# Altium PCB board.PcbDoc
Units mm, origin at the board's own origin, x right, y up, seen from the top; angles counter-clockwise.
Board outline 45 x 42 mm, 2 copper layers (Top Layer, Bottom Layer), stack 1.57 mm thick; 103 components, 64 nets, 280 pads, 215 vias.
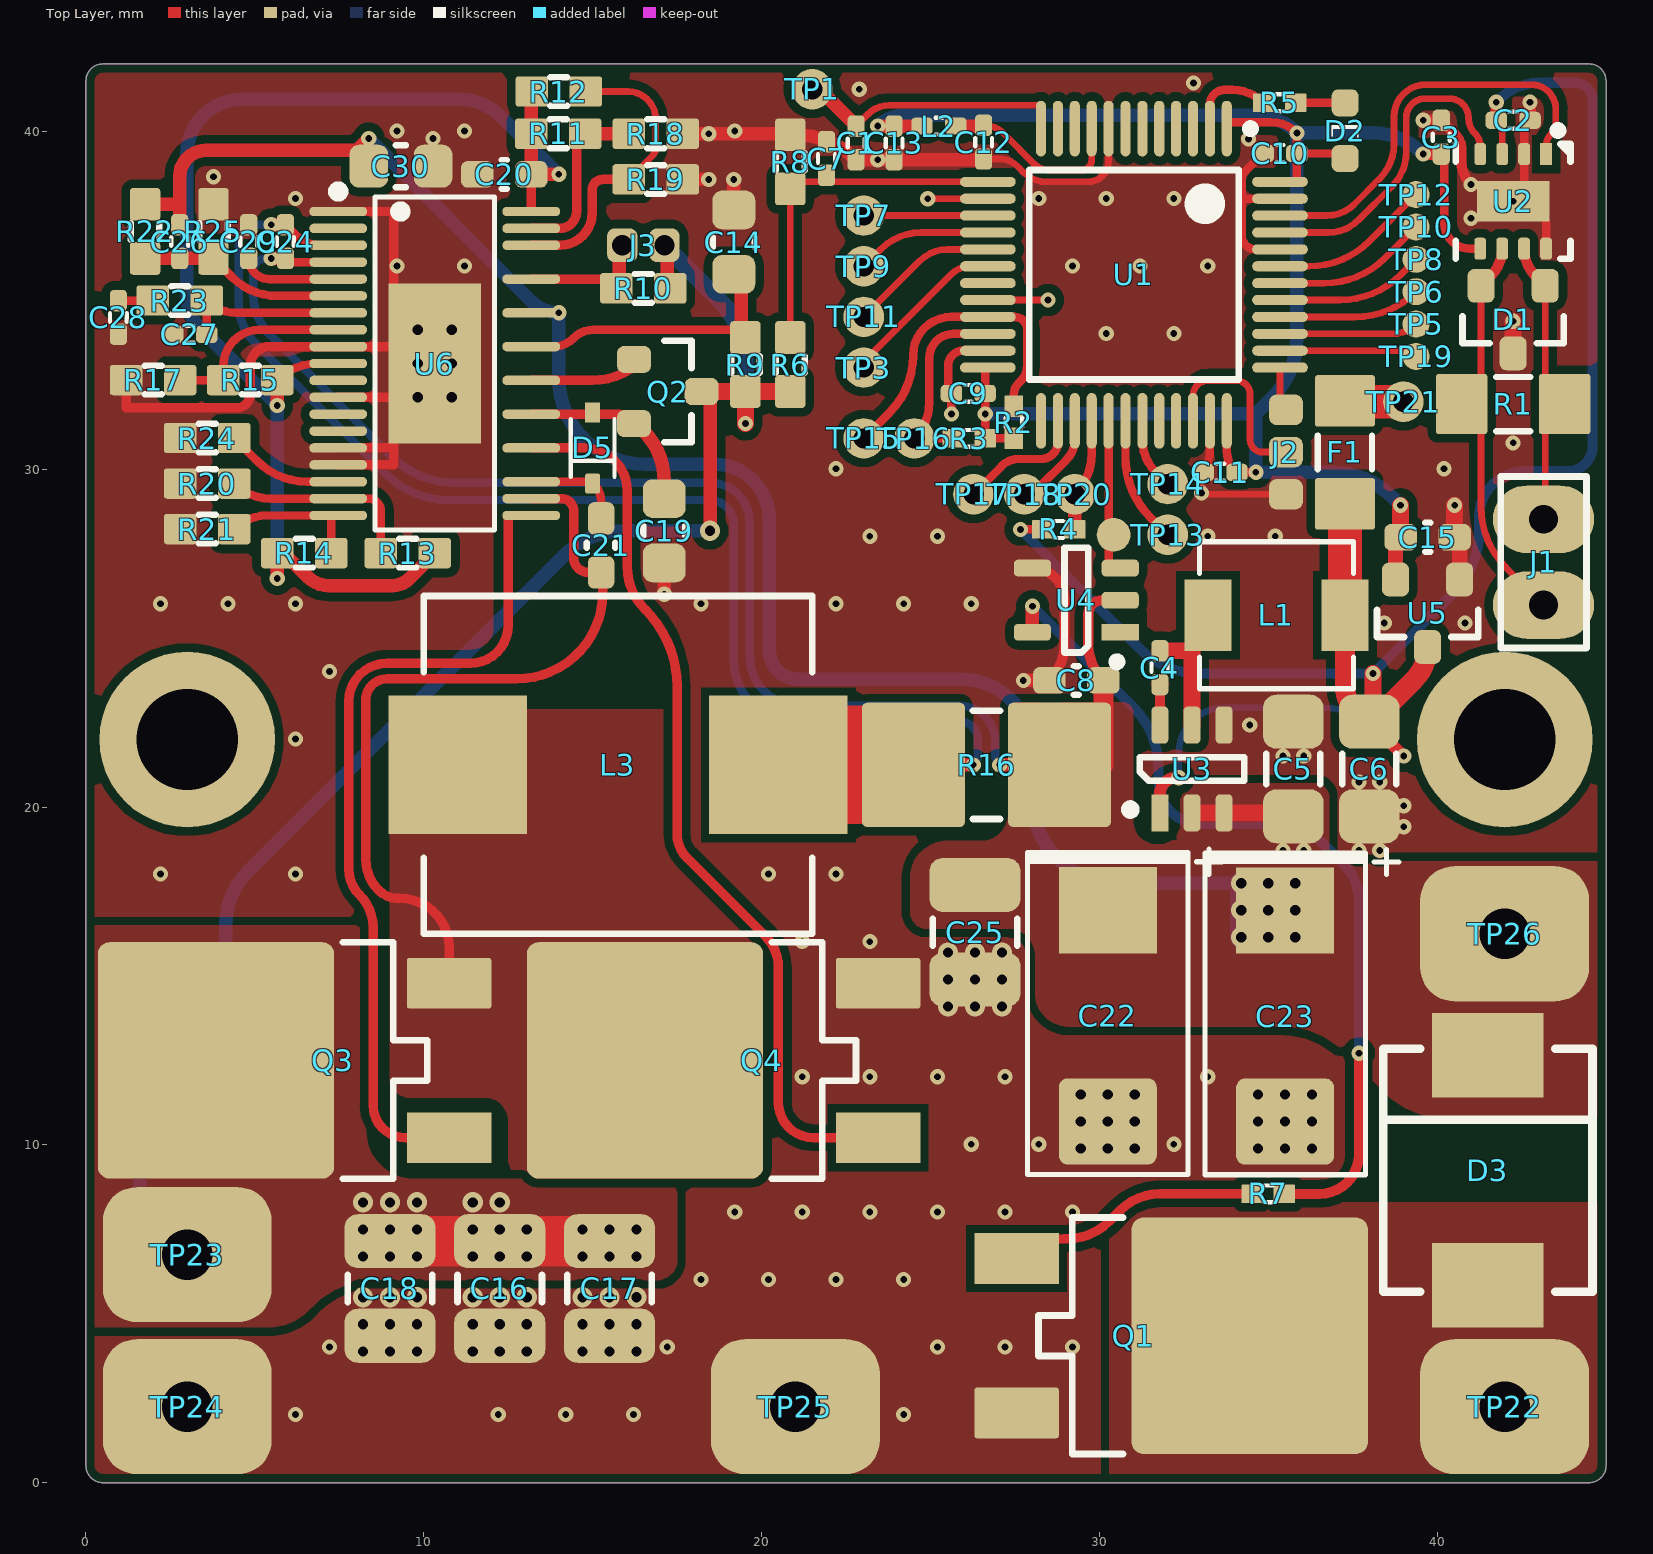
[diagram p0: Top Layer view]
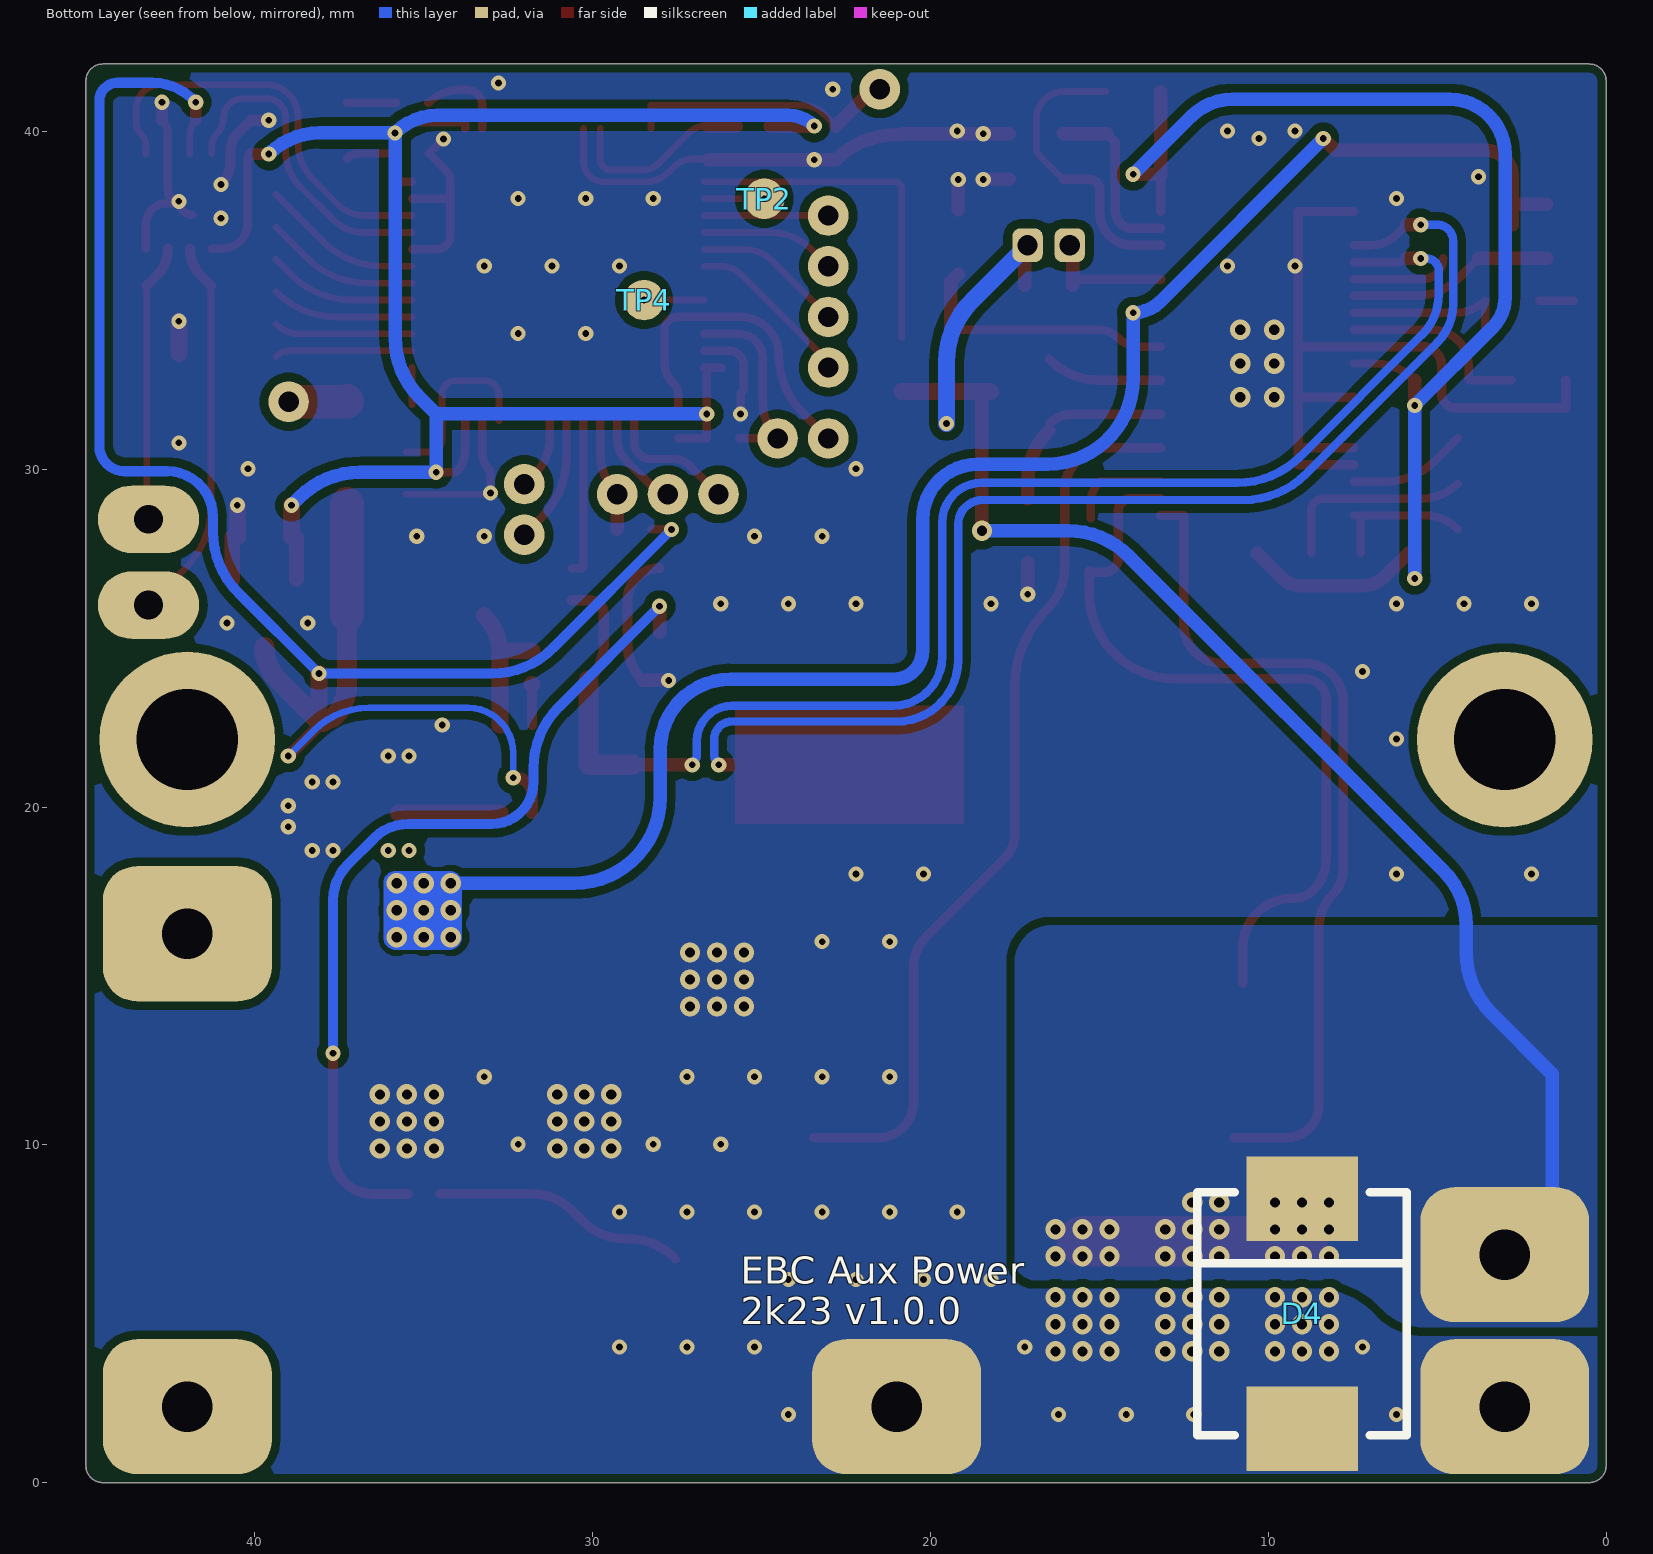
[diagram p1: Bottom Layer view, seen from below]
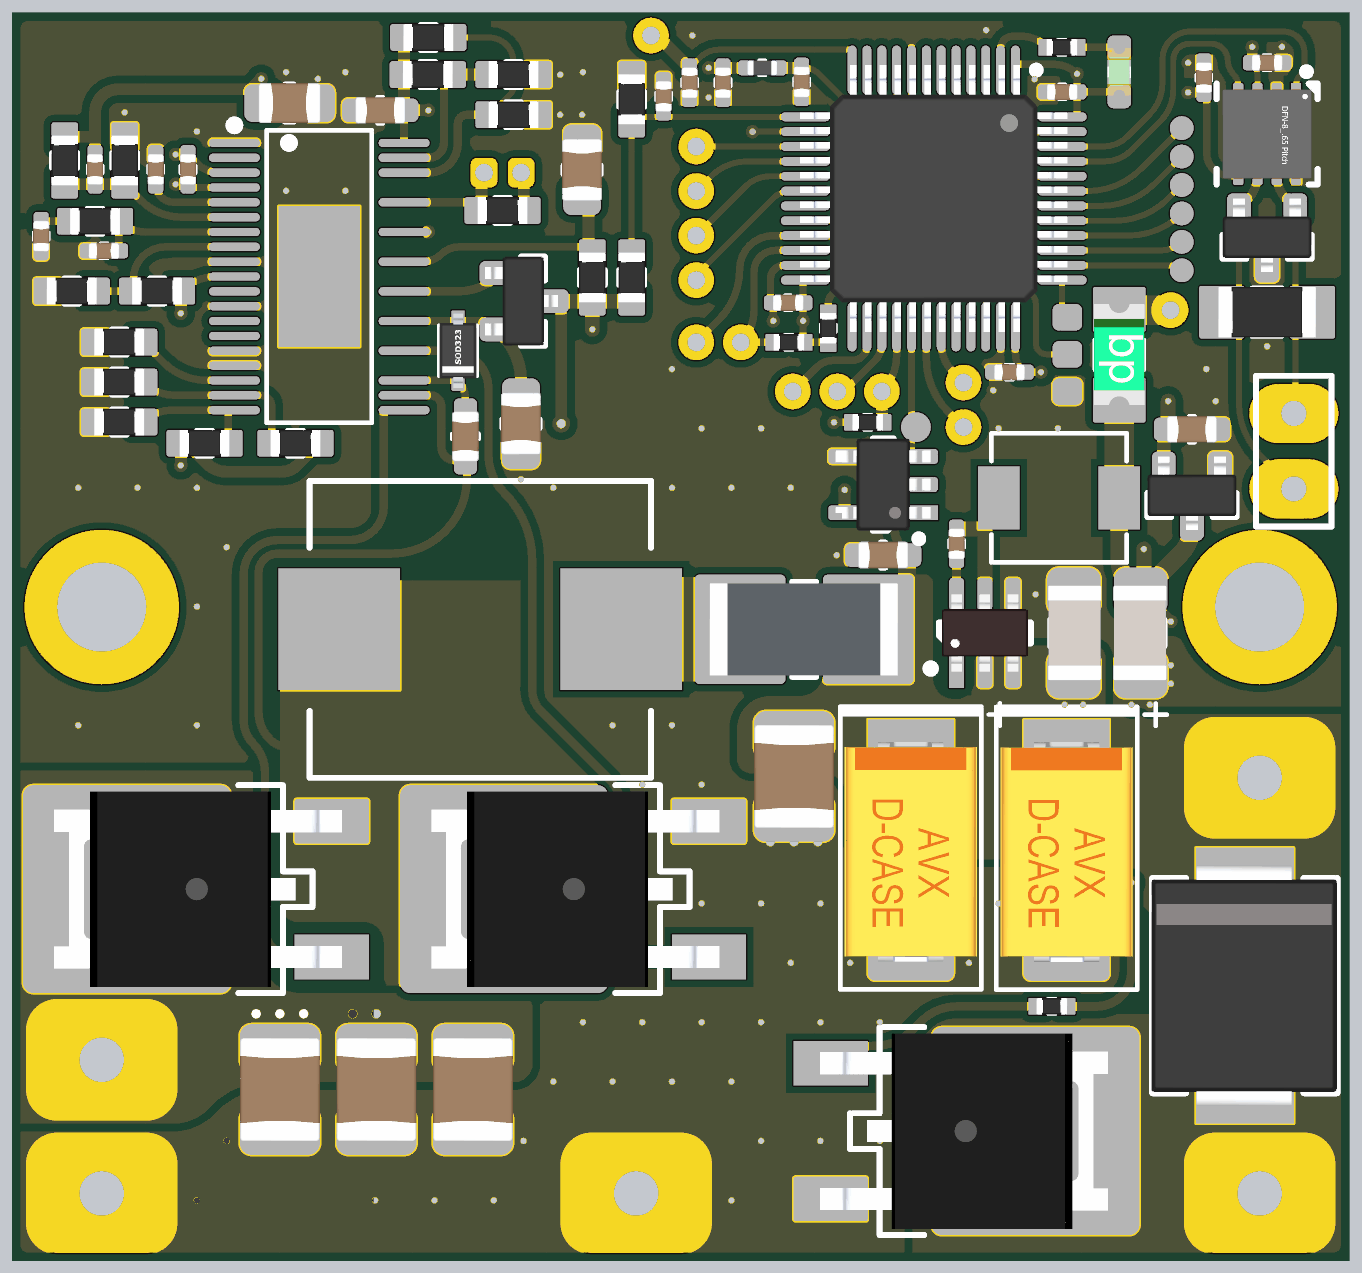
[diagram p2: 3D render of the assembled board from above, using the file's embedded part models]

## Layer stack, top to bottom
Top Solder: solder mask 0.0127, Solder Resist, Dk 3.8
Top Layer: signal copper 0.035
Dielectric: core 1.5, FR-4, Dk 4.5
Bottom Layer: signal copper 0.035
Bottom Solder: solder mask 0.0127, Solder Resist, Dk 3.8

## Board outline
0,0.5 ccw(c0.5,0.5) 0.5,0 44.5,0 44.5,-0.001 ccw(c44.5,0.499) 45,0.499 45,0.5 45,41.5 ccw(c44.5,41.5) 44.5,42 0.5,42 ccw(c0.5,41.5) 0,41.5

## Design rules (kind name [scope] priority, off if disabled: settings)
Clearance Clearance_2 [All] p1: gap=0.127 ignorepadtopadclearanceinfootprint=FALSE except(0: Arc-Hole Track-Hole SMDPad-Hole THPad-Hole Via-Hole Fill-Hole Poly-Hole Region-Hole Text-Hole; 0.254: Arc-Poly Track-Poly SMDPad-Poly THPad-Poly Via-Poly Fill-Poly Poly-Poly)
ComponentClearance [All] p1: gap=0.254 collisioncheckmode=3 verticalgap=0.254 showdistances=FALSE donotcheckwithout3dbody=TRUE
Height [All] p1 off: minheight=0 maxheight=25.4 prefheight=12.7
HoleSize [All] p1: absolutevalues=TRUE maxlimit=3 minlimit=0.025 maxpercent=80.000 minpercent=20.000
MinimumSolderMaskSliver [All] p1 off: minsoldermaskwidth=0.254
PolygonConnect [All] p1: connectstyle=Direct reliefconductorwidth=0.254 reliefentries=4 polygonreliefangle="90 Angle" airgapwidth=0.254
RoutingVias [All] p1: holewidth=0.711 width=1.524 viastyle="Through Hole" minholewidth=0.025 minwidth=0.025 maxholewidth=7.112 maxwidth=12.7
SilkToSilkClearance [All] p1 off: silktosilkclearance=0.254
SilkToSolderMaskClearance [IsPad] p1 off: minsilkscreentomaskgap=0.254 clearancetoexposedcopper=TRUE
SolderMaskExpansion [All] p1: expansion=0.05 istentingtop=FALSE
Width [All] p1: maxlimit=500 minlimit=0.15 preferedwidth=0.254
24 further rules are at their usual default settings.

## Components (designator, comment, footprint, x,y, rotation, side; value= is the part's Value field where it differs from the comment)
C1 "100nF" C0402 22.8,39.661 r90 top
C2 "100nF" C0402 42.25,40.332 r180 top
C3 "100nF" C0402 40.122,39.832 r270 top
C4 "100nF" C0402 31.793,24.128 r90 top
C5 "10uF" C1206 35.743,21.128 r270 top
C6 "10uF" C1206 37.993,21.128 r90 top
C7 "100nF" C0402 21.924,39.2 r270 top
C8 "2.2uF" C0603 29.32,23.75 r0 top
C9 "100nF" C0402 26.12,32.248 r0 top
C10 "100nF" C0402 35.349,39.35 r0 top
C11 "100nF" C0402 33.575,29.911 r0 top
C12 "100nF" C0402 26.574,39.686 r90 top
C13 "100nF" C0402 23.925,39.661 r90 top
C14 "10uF" C0805 19.179,36.725 r90 top
C15 "10uF" C0603 39.718,27.988 r180 top
C16 "2u2" C1210 12.25,5.75 r90 top
C17 "2u2" C1210 15.5,5.75 r90 top
C18 "2u2" C1210 9,5.75 r90 top
C19 "4u7" C0805 17.12,28.18 r270 top
C20 "100n" C0603 12.382,38.732 r0 top
C21 "100n" C0603 15.25,27.749 r90 top
C22 "150uF" C7343 30.25,13.757 r270 top
C23 "150uF" C7343 35.5,13.75 r270 top
C24 "1n" C0402 5.906,36.742 r90 top
C25 "22u" C1210 26.32,16.295 r90 top
C26 "" C0402 2.775,36.742 r270 top
C27 "100p" C0402 3.075,33.996 r180 top
C28 "4n7" C0402 0.96,34.496 r270 top
C29 "100n" C0402 4.818,36.742 r90 top
C30 "1u" C0805 9.325,38.974 r0 top
D1 "PESD2CAN" SOT-23 42.25,34.432 r90 top
D2 "GRN" LED-0603-GRN 37.274,40.025 r270 top
D3 "" SMC 41.5,9.25 r270 top
D4 "90V?" SMC 9,5 r270 bottom
D5 "1N4148WS" SOD-323 15,30.632 r90 top
F1 "0.25A" FUSE-1206 37.271,30.5 r270 top
J1 "" HDR-1X2_2.54 43.15,27.25 r0 top
J2 "SWD" HDR-1x3-P1.25 35.524,30.511 r270 top
J3 "" HDR-1x2-P1.25 16.5,36.632 r180 top
L1 "4.7uH" IND-SMD_L4.4-W4.2 35.243,25.678 r180 top
L2 "BEAD" L0402 25.25,40.161 r0 top
L3 "33uH" IND_10X11.5MM 15.75,21.25 r0 top
Q1 "AOD66923" "TO-252AA (DPAK)" 31,4.35 r90 top
Q2 "BSS123" SOT-23 17.226,32.303 r180 top
Q3 "AOD66923" "TO-252AA (DPAK)" 7.3,12.5 r270 top
Q4 "AOD66923" "TO-252AA (DPAK)" 20,12.5 r270 top
R1 "1k" R1206 42.25,31.932 r0 top
R2 "2k2" R0402 27.469,31.391 r270 top
R3 "2k2" R0402 26.144,30.915 r0 top
R4 "2k2" R0402 28.798,28.22 r180 top
R5 "470" R0402 35.339,40.85 r180 top
R6 "100k" R0603 20.85,33.103 r270 top
R7 "4R7" R0402 35,8.55 r180 top
R8 "3k" R0603 20.85,39.102 r270 top
R9 "2.2" R0603 19.523,33.103 r90 top
R10 "100k" R0603 16.5,35.357 r180 top
R11 "" R0603 13.983,39.934 r0 top
R12 "" R0603 14,41.184 r0 top
R13 "" R0603 9.525,27.518 r180 top
R14 "" R0603 6.463,27.518 r0 top
R15 "" R0603 4.863,32.642 r180 top
R16 "6mR" R2512-WIDE 26.66,21.25 r0 top
R17 "0" R0603 1.989,32.642 r180 top
R18 "0" R0603 16.869,39.934 r0 top
R19 "" R0603 16.869,38.582 r0 top
R20 "100k" R0603 3.589,29.578 r180 top
R21 "0" R0603 3.589,28.23 r180 top
R22 "180k" R0603 1.75,37.042 r270 top
R23 "10k" R0603 2.775,34.996 r180 top
R24 "30k" R0603 3.589,30.926 r180 top
R25 "13k" R0603 3.775,37.042 r90 top
TP1 "" TP_THT#1 21.5,41.231 r180 top
TP2 "" TP_THT#2 24.921,38.011 r180 bottom
TP3 "" TP_THT#3 23.024,33.011 r180 top
TP4 "" TP_THT#2 28.477,35.011 r180 bottom
TP5 "" TP_THT#4 39.376,34.299 r270 top
TP6 "" TP_THT#4 39.376,35.257 r270 top
TP7 "" TP_THT#3 23.024,37.511 r180 top
TP8 "" TP_THT#4 39.376,36.216 r270 top
TP9 "" TP_THT#3 23.024,36.011 r180 top
TP10 "" TP_THT#5 39.308,37.188 r180 top
TP11 "" TP_THT#3 23.024,34.511 r180 top
TP12 "" TP_THT#6 39.282,38.221 r180 top
TP13 "" TP_THT#3 32.024,28.061 r180 top
TP14 "" TP_THT#3 32.024,29.561 r270 top
TP15 "" TP_THT#3 23.024,30.915 r180 top
TP16 "" TP_THT#3 24.524,30.915 r180 top
TP17 "" TP_THT#3 26.274,29.261 r180 top
TP18 "" TP_THT#3 27.774,29.261 r180 top
TP19 "" TP_THT#4 39.376,33.341 r270 top
TP20 "" TP_THT#3 29.274,29.261 r180 top
TP21 "" TP_THT#7 39.009,31.998 r270 top
TP22 "" TP_THT#8 42.142,2.25 r270 top
TP23 "" TP_THT#9 3,6.75 r270 top
TP24 "" TP_THT#9 3,2.25 r270 top
TP25 "" TP_THT#10 20,2.25 r270 top
TP26 "" TP_THT#11 42,16 r270 top
U1 "STM32F103CBT6" LQFP-48 31.024,35.761 r270 top
U2 "SIT1042QTK/3" DFN8_3X3_P065 42.25,37.932 r270 top
U3 "AP63205" SOT-23-6 32.743,21.128 r0 top
U4 "MCP1416T" SOT-23-5 29.32,26.125 r0 top
U5 "XC6206P332MR" SOT-23 39.718,25.738 r90 top
U6 "LTC3895HFE#PBF" TSSOP-38_L9.7-W4.4-P0.50-LS6.4-BL-EP-PE 10.325,33.132 r270 top

## Footprints (in the part's own frame and the unit in brackets; to place one, negate y for a bottom-side part, rotate by r counter-clockwise, add the part's x,y. Pads: shape width x height; smd on the part's side, far side on the other; paste and mask are expansions set on the pad)
C0402 [mm] "Chip Capacitor Body"
  rrect50% 0.635x0.508 smd mask+0.05: 1(-0.5,0) 2(0.5,0)
  silkscreen extent -0.13,-0.25 0.13,0.25, body extent -0.52,-0.27 0.53,0.28, height 0.55
C0603 [mil] "Chip Capacitor"
  rrect50% 38x31 smd mask+1.97: 1(-31.5,0) 2(31.5,0)
  silkscreen extent -3,-17 3,17, body extent -33,-18 33,18, height 35
C0805 [mil] "Chip Capacitor"
  rrect50% 45x50 smd mask+1.97: 1(-37.5,0) 2(37.5,0)
  silkscreen extent -6,-25 6,25, body extent -41,-27 41,27, height 53
C1206 [mm] "Chip Capacitor"
  rrect50% 1.6x1.8 smd: 1(-1.4,0) 2(1.4,0)
  silkscreen extent -0.45,-0.8 0.45,0.8, body extent -1.6,-0.88 1.6,0.92, height 1.6
C1210 [mm] "Chip Capacitor"
  rrect50% 1.6x2.7 smd mask+0.05: 1(-1.4,0) 2(1.4,0)
  silkscreen extent -0.4,-1.25 0.4,1.25, body extent -1.75,-1.35 1.75,1.35, height 1.8
C7343 [mm] "C7343_1"
  rect 2.55x2.9 smd: 1(-3.188,0)
  rrect20% 2.55x2.9 smd: 2(3.061,0)
  silkscreen extent -5,-2.37 4.64,3.37, body extent -3.7,-2.22 3.7,2.22, height 3.01
DFN8_3X3_P065 [mm]
  rect 0.65x0.35 smd mask+0.05: 1(-1.4,0.975)
  rrect50% 0.65x0.35 smd mask+0.05: 2(-1.4,0.325) 3(-1.4,-0.325) 4(-1.4,-0.975) 5(1.4,-0.975) 6(1.4,-0.325) 7(1.4,0.325) 8(1.4,0.975)
  rect 1.2x2.15 smd mask+0.05: 9(0,0)
  silkscreen extent -2.22,-1.7 1.7,1.7, body extent -1.51,-1.5 1.51,1.5, height 0.8
FUSE-1206 [mil] "Chip FUSE;"
  rrect10% 60x70 smd mask+1.97: 1(-60,0) 2(60,0)
  silkscreen extent -20,-31 20,31, body extent -67,-33 67,33, height 31
HDR-1x2-P1.25 [mm]
  rrect50% 0.9x1 hole 0.6: 1(-0.625,0) 2(0.625,0)
HDR-1X2_2.54 [mm]
  oval 3x2 hole 0.85: 1(0,1.27) 2(0,-1.27)
  silkscreen extent -1.27,-2.54 1.27,2.54
HDR-1x3-P1.25 [mm]
  rrect50% 0.9x1 smd: 1(-1.25,0) 2(0,0) 3(1.25,0)
IND-SMD_L4.4-W4.2 [mm]
  rect 1.4x2.12 smd: 1(2.028,0) 2(-2.028,0)
  silkscreen extent -2.28,-2.18 2.28,2.18, body extent -2.28,-2.18 2.28,2.18, height 1.8
IND_10X11.5MM [mm]
  rect 4.1x4.1 smd: 1(-4.75,0) 2(4.75,0)
  silkscreen extent -5.75,-5 5.75,5, body extent -6,-5 6,5, height 4.8
L0402 [mm] "Chip Inductor"
  rrect50% 0.635x0.508 smd mask+0.05: 1(-0.5,0) 2(0.5,0)
  silkscreen extent -0.1,-0.25 0.1,0.25, body extent -0.5,-0.25 0.5,0.25, height 0.5
LED-0603-GRN [mm]
  rrect50% 0.8x0.8 smd mask+0.05: 1(0.825,0) 2(-0.825,0)
  silkscreen extent -0.18,-0.4 0.2,0.4, body extent -0.8,-0.4 0.8,0.4, height 0.6
LQFP-48 [mm]
  oval 1.65x0.3 smd: 1(-4.325,2.75) 2(-4.325,2.25) 3(-4.325,1.75) 4(-4.325,1.25) 5(-4.325,0.75) 6(-4.325,0.25) 7(-4.325,-0.25) 8(-4.325,-0.75) 9(-4.325,-1.25) 10(-4.325,-1.75) 11(-4.325,-2.25) 12(-4.325,-2.75) 25(4.325,-2.75) 26(4.325,-2.25) 27(4.325,-1.75) 28(4.325,-1.25) 29(4.325,-0.75) 30(4.325,-0.25) 31(4.325,0.25) 32(4.325,0.75) 33(4.325,1.25) 34(4.325,1.75) 35(4.325,2.25) 36(4.325,2.75)
  oval 0.3x1.65 smd: 13(-2.75,-4.325) 14(-2.25,-4.325) 15(-1.75,-4.325) 16(-1.25,-4.325) 17(-0.75,-4.325) 18(-0.25,-4.325) 19(0.25,-4.325) 20(0.75,-4.325) 21(1.25,-4.325) 22(1.75,-4.325) 23(2.25,-4.325) 24(2.75,-4.325) 37(2.75,4.325) 38(2.25,4.325) 39(1.75,4.325) 40(1.25,4.325) 41(0.75,4.325) 42(0.25,4.325) 43(-0.25,4.325) 44(-0.75,4.325) 45(-1.25,4.325) 46(-1.75,4.325) 47(-2.25,4.325) 48(-2.75,4.325)
  silkscreen extent -4.45,-3.1 3.1,3.58, body extent -4.5,-4.5 4.5,4.5, height 1.5
R0402 [mm]
  rrect10% 0.635x0.55 smd mask+0.05: 1(-0.476,0) 2(0.476,0)
  silkscreen extent -0.12,-0.25 0.13,0.25, body extent -0.52,-0.27 0.53,0.28, height 0.4
R0603 [mil] "Chip Resistor; Body 1.6 x 0.8 mm (LxW typ)"
  rrect20% 38x35.43 smd mask+1.97: 1(-31.5,0) 2(31.5,0)
  silkscreen extent -10,-17 10,17, body extent -33,-18 33,18, height 22
R1206 [mil] "Chip Resistor"
  rrect10% 60x70 smd mask+1.97: 1(-60,0) 2(60,0)
  silkscreen extent -20,-31 20,31, body extent -65,-33 65,33, height 26
R2512-WIDE [mm] "Chip Resistor; Body 6.4 x 3.2 mm (LxW typ)"
  rrect10% 3.05x3.68 smd mask+0.05: 1(-2.16,0) 2(2.16,0)
  silkscreen extent -0.4,-1.6 0.4,1.6, body extent -3.19,-1.55 3.16,1.55, height 0.55
SMC [mm]
  rect 2.5x3.3 smd: 1(3.4,0) 2(-3.4,0)
  silkscreen extent -3.6,-3.1 3.6,3.1, body extent -4.08,-3.15 4.08,3.1, height 2.65
SOD-323 [mm]
  rect 0.59x0.45 smd mask+0.05: 1(1.055,0)
  rrect30% 0.59x0.45 smd mask+0.05: 2(-1.055,0)
  silkscreen extent -0.85,-0.65 0.85,0.65, body extent -1.25,-0.63 1.25,0.62, height 0.99
SOT-23 [mm]
  rrect50% 1x0.8 smd mask+0.05: 1(1,-0.95) 2(1,0.95) 3(-1,0)
  silkscreen extent -0.7,-1.5 0.1,1.5, body extent -1.27,-1.5 1.33,1.5, height 1.1
SOT-23-5 [mm]
  rect 1.1x0.5 smd mask+0.05: 1(1.3,-0.95)
  rrect50% 1.1x0.5 smd mask+0.05: 2(1.3,0) 3(1.3,0.95) 4(-1.3,0.95) 5(-1.3,-0.95)
  silkscreen extent -0.35,-1.95 1.33,1.55, body extent -1.6,-1.55 1.6,1.55, height 1.45
SOT-23-6 [mm]
  rect 0.5x1.1 smd mask+0.05: 1(-0.95,-1.3)
  rrect50% 0.5x1.1 smd mask+0.05: 2(0,-1.3) 3(0.95,-1.3) 4(0.95,1.3) 5(0,1.3) 6(-0.95,1.3)
  silkscreen extent -1.95,-1.32 1.55,0.35, body extent -1.45,-1.3 1.45,1.3, height 1.14
"TO-252AA (DPAK)" [mm] "D-PAK"
  rect 1.5x2.5 smd: 1(2.286,3.45)
  rrect10% 7x7 smd: 2(0,-3.45)
  rrect10% 1.5x2.5 smd: 3(-2.286,3.45)
  silkscreen extent -3.5,0.3 3.5,2.8, body extent -3.29,-5.9 3.29,3.8, height 2.3
TP_THT#1 [mm]
  round 1.2 hole 0.6: 1(0,-0.019)
TP_THT#2 [mm]
  round 1.2 smd: 1(0,0)
TP_THT#3 [mm]
  round 1.2 hole 0.6: 1(0,0)
TP_THT#4 [mm]
  round 0.8 smd: 1(0,0)
TP_THT#5 [mm]
  round 0.8 smd: 1(-0.068,0.014)
TP_THT#6 [mm]
  round 0.8 smd: 1(-0.094,0.089)
TP_THT#7 [mm]
  round 1.2 hole 0.6: 1(-0.002,-0.009)
TP_THT#8 [mm]
  rrect50% 4x5 hole 1.5: 1(0,-0.142)
TP_THT#9 [mm]
  rrect50% 4x5 hole 1.5: 1(0,0)
TP_THT#10 [mm]
  rrect50% 4x5 hole 1.5: 1(0,1)
TP_THT#11 [mm]
  rrect50% 4x5 hole 1.5: 1(-0.25,0)
TSSOP-38_L9.7-W4.4-P0.50-LS6.4-BL-EP-PE [mm]
  oval 0.28x1.715 smd paste+0 mask+0.051: 1(-4.5,-2.858) 2(-4,-2.858) 3(-3.5,-2.858) 4(-3,-2.858) 5(-2.5,-2.858) 6(-2,-2.858) 7(-1.5,-2.858) 8(-1,-2.858) 9(-0.5,-2.857) 10(0,-2.857) 11(0.5,-2.857) 12(1,-2.857) 13(1.5,-2.857) 14(2,-2.857) 15(2.5,-2.857) 16(3,-2.857) 17(3.5,-2.857) 18(4,-2.857) 19(4.5,-2.857) 20(4.5,2.858) 21(4,2.858) 22(3.5,2.858) 24(2.5,2.858) 26(1.5,2.858) 28(0.5,2.857) 30(-0.5,2.857) 32(-1.5,2.857) 34(-2.5,2.857) 36(-3.5,2.857) 37(-4,2.857) 38(-4.5,2.857)
  rect 4.75x2.74 smd paste+0 mask+0.051: 39(0,0)
  silkscreen extent -5.24,-3.01 4.93,1.77, body extent -4.85,-2.2 4.85,2.2, height 0.8

## Part data
C1 C4 C7 C9 C10 C11 C12 C13 C15 C16 C17 C18: library part CAP
C2 C3: library part CAP, LCSC part number=C131394, P/N=CC0402KRX7R9BB104
C5 C6 C14 C19 C20 C21 C24 C26 C27 C28 C29 C30: library part CAP, LCSC part number=C89632, P/N=CL31B106KBHNNNE
C8: library part CAP, LCSC part number=C415535, P/N=GRM188Z71E225KE43D
C22 C23: library part 220uF
C25: library part CAP, LCSC part number=C778721, P/N=GMK325BJ226MM-P
D1: library part CDSOT23-SM712, LCSC part number=C5261081, P/N=PESD2CAN
D2: library part LED-0603-GREEN, "LED 0603 GRN"
D3 D4 D5: library part NCP51460SN33T1G, LCSC part number=C693617, P/N=SMCJ24A
F1: library part "Fuse 1", LCSC part number=C2924950, P/N=TLC-LSMD075/60
J1 J3: library part "Header 2"
J2: library part "Header 3"
L1: LCSC part number=C167208, P/N=FXL0420-4R7-M
L2: library part BLM18AG601SN1D, "BEAD 0402"
L3: library part SRN3015-100M, "FXL1050-330-M"
Q1 Q3 Q4: library part 2N7002
Q2: library part IRLML2402, "HEXFET Power MOSFET"
R1 R2 R3 R4 R5 R6 R8 R9 R10 R11 R12 R13 R14 R15 R16 R17 R18 R19 R20 R21 R22 R23 R24 R25: library part RES
R7: library part RES, LCSC part number=C137862, P/N=RC0402JR-074R7L
TP1 TP2 TP3 TP4 TP5 TP6 TP7 TP8 TP9 TP10 TP11 TP12 TP13 TP14 TP15 TP16 TP17 TP18 TP19 TP20 TP21 TP22 TP23 TP24 TP25 TP26: library part TP_Dup1
U2: library part LTC2875, "IC INTERFACE CAN", LCSC part number=C5308062, P/N=SIT1042QTK/3
U3: library part AP63203WU-7, LCSC part number=C780769, P/N=AP63203WU-7
U4: library part FL3100T, "IC GATE DRVR LOW-SIDE SOT23", LCSC part number=C83775, P/N=MCP1416T-E/OT
U5: library part Component_4_1
U6: LCSC part number=C580817, P/N=LTC3895HFE#PBF

## Free pads (board coordinates)
  round 1 smd: 2(30.422,28.061)
  round 5.2 hole 3: M(3,22) M(42,22)

## Via types
v1: diameter 0.45, hole 0.2, Top Layer to Bottom Layer, tented both sides, 122 vias
v2: diameter 0.6, hole 0.3, Top Layer to Bottom Layer, tented both sides, 87 vias
v3: diameter 0.61, hole 0.305, Top Layer to Bottom Layer, tented bottom, 6 vias

## Nets (pads, with @x,y where several pads share a name; then routed paths per layer and width w, separated by ;. In a path a pad name is that pad's centre, name@x,y a point inside that pad or via, vN(x,y) a via of type N, cw(c..) or ccw(c..) an arc to the next point about the centre after c; other vN are vias at no path point)
1_MISO: TP9.1 U1.16 | length 4
  Top Layer w0.2: TP9.1 23.523,36.51 cw(c24.733,35.3) 24.733,37.011 U1.16
1_MOSI: TP11.1 U1.17 | length 4.5
  Top Layer w0.2: TP11.1 24.681,36.168 cw(c25.509,35.34) 25.509,36.511 U1.17
1_SCK: TP7.1 U1.15 | length 3.7
  Top Layer w0.2: TP7.1 U1.15
2_MISO: TP18.1 U1.27 | length 2.9
  Top Layer w0.25: TP18.1 ccw(c27.774,29.823) 28.172,29.426 29.024,30.278 ccw(c28.422,30.881) 29.274,30.881 U1.27
2_MOSI: R4.1 TP20.1 U1.28 | length 3.3
  Top Layer w0.25: TP20.1 ccw(c28.068,30.467) 29.28,29.267 ccw(c28.068,30.467) 29.774,30.467 U1.28
  Top Layer w0.4: R4.1 TP20.1
2_SCK: TP17.1 U1.26 | length 3.8
  Top Layer w0.25: TP17.1 27.116,30.103 cw(c27.606,29.612) 27.606,30.306 28.273,30.306 ccw(c28.273,30.806) 28.774,30.806 U1.26
3V3: C3.2 C9.2 C10.2 C11.2 C13.2 C15.2 D2.1 L2.1 R2.2 R3.2 U1.1 U1.24 U1.36 U1.48 U2.5 U5.2 | length 58.7
  Top Layer w0.25: U1.24@26.183,33.011 U1.24@26.62,33.011 ; U1.24 U1.24@26.62,33.011 ; R2.2 R3.2 v1(26.62,31.638) C9.2 U1.24@26.62,33.011 ; U1.36 33.774,30.54 ccw(c34.627,30.54) C11.2@34.024,29.936 ; U1.1 33.774,40.279 35.078,40.279 cw(c35.078,39.189) v1(35.849,39.96) C10.2 ; C11.2@34.049,29.911 C11.2 v1(34.634,29.911) ; U1.48 35.849,38.511 C10.2 ; D2.1 ccw(c36.913,38.839) 36.913,39.35 C10.2 ; C3.2 40.213,39.241 40.213,37.285 ccw(c40.966,37.285) 40.966,36.532 U2.5
  Top Layer w0.35: v1(39.587,39.332) C3.2
  Top Layer w0.4: v1(23.441,40.161) C13.2 L2.1
  Top Layer w0.45: U5.2 38.768,27.988 C15.2
  Top Layer w0.5: C15.2 v1(38.918,28.936)
  Bottom Layer w0.4: v1(23.441,40.161) cw(c24.206,39.396) 24.206,40.479 34.596,40.479 cw(c34.596,38.707) v1(35.849,39.96) ; v1(26.62,31.638) 34.634,31.638 ; v1(38.918,28.936) 38.687,29.167 ccw(c36.891,27.371) 36.891,29.911 v1(34.634,29.911) 34.634,31.638 ; v1(39.587,39.332) ccw(c38.073,37.818) 38.073,39.96 v1(35.849,39.96) ; 34.634,31.638 35.105,32.109 ccw(c33.309,33.905) 35.849,33.905 v1(35.849,39.96)
5V: C2.2 C6.2 F1.2 L1.2 R4.2 U2.3 U3.1 U5.3 | length 60.3
  Top Layer w0.2: C2.2 cw(c41.328,39.91) 41.925,39.91 U2.3
  Top Layer w0.25: v1(27.663,28.22) R4.2@28.273,28.22
  Top Layer w0.35: U3.1 31.793,20.385 cw(c32.276,20.385) 32.276,20.867 v1(32.352,20.867) ; C6.2 v1(39.009,21.512) ; C2.2 v1(41.75,40.867)
  Top Layer w0.5: C6.2@38.1,23.007 v1(38.1,23.955)
  Top Layer w0.6: L1.2 37.271,23.628 ccw(c38.638,23.628) 37.672,22.662 C6.2 38.078,22.528 39.316,23.766 ccw(c38.345,24.738) U5.3
  Top Layer w1: L1.2 F1.2
  Bottom Layer w0.2: v1(32.352,20.867) 32.352,21.602 cw(c33.69,21.602) 33.69,22.94 36.615,22.94 cw(c36.615,20.605) 38.266,22.256 v1(39.009,21.512)
  Bottom Layer w0.3: v1(27.663,28.22) 31.184,24.699 ccw(c32.981,26.495) 32.981,23.955 v1(38.1,23.955) 40.493,26.348 ccw(c38.697,28.144) 41.237,28.144 41.237,28.585 cw(c42.596,28.585) 42.596,29.944 43.859,29.944 ccw(c43.859,30.69) 44.605,30.69 44.605,40.905 ccw(c44.066,40.905) 44.066,41.444 43.028,41.444 ccw(c43.028,39.754) v1@41.754,40.864
12V: C5.2 C8.2 C22.1 C23.1 C24.1 C25.2 C26.1 C30.1 D3.2 R16.2 R22.1 TP26.1 U3.2 U3.3 U4.2 U6.4 U6.32 | length 95.9
  Top Layer w0.25: C24.1 ccw(c6.171,36.508) 6.171,36.132 U6.4
  Top Layer w0.3: C8.2 cw(c31.207,24.837) 29.67,24.837 29.67,25.712 cw(c30.083,25.712) 30.083,26.125 U4.2
  Top Layer w0.4: R22.1 2.775,37.843 ; C26.1 2.775,37.843 ; v1(5.488,36.242) C24.1 ; v1(8.372,39.791) 8.023,39.442 3.551,39.442 ccw(c3.551,38.666) 2.775,38.666 2.775,37.843 ; v1(27.053,21.25) R16.2
  Top Layer w0.5: U3.2 U3.3 C5.2@35.743,19.828
  Top Layer w0.6: R16.2 30.12,21.25 C8.2
  Bottom Layer w0.25: 5.445,33.987 9.063,30.369 ccw(c10.916,32.222) 10.916,29.601 18.476,29.601 cw(c18.476,28.424) 19.654,28.424 19.654,24.451 ccw(c21.105,24.451) 21.105,23 25.871,23 cw(c25.871,21.957) 26.914,21.957 26.914,21.584 ccw(c27.387,21.584) v1(27.053,21.25) ; 5.444,33.988 cw(c6.64,35.182) 4.95,35.182 4.95,35.882 cw(c5.31,35.882) 5.31,36.242 v1(5.488,36.242)
  Bottom Layer w0.4: v1(8.372,39.791) 13.2,34.964 ccw(c14,35.764) v1(14,34.632) 14,32.693 ccw(c16.54,32.693) 16.54,30.153 18.593,30.153 cw(c18.593,28.514) 20.232,28.514 20.232,24.639 ccw(c21.083,24.639) 21.083,23.787 25.916,23.787 cw(c25.916,21.703) 28,21.703 28,20.285 ccw(c30.54,20.285) 30.54,17.745 v2(34.2,17.745)
  other v1: 35.434,18.712 36.053,18.712
  other v2: 34.2,16.145 35,16.145 35.8,16.145 34.2,16.945 35,16.945 35.8,16.945 35,17.745 35.8,17.745
_NC2: TP4.1 U1.20 | length 1.8
  Top Layer w0.2: U1.20 v1(28.477,35.011)
ADC_1: C1.2 TP1.1 U1.12 | length 8.1
  Top Layer w0.2: C1.2 23.152,40.513 cw(c23.781,39.884) 23.781,40.774 28.274,40.774 U1.12
  Top Layer w0.4: TP1.1 cw(c21.5,40.739) 21.861,41.1 C1.2
ADC_4: TP2.1 U1.14 | length 1.8
  Top Layer w0.2: v1(24.921,38.011) U1.14
B_SENS: C7.2 R6.1 R8.2 U1.13 | length 10.4
  Top Layer w0.2: R6.1 R8.2 cw(c21.059,38.302) 21.059,38.511 21.12,38.511 U1.13
CAN_H: D1.1 J1.1 R1.2 U2.7 | length 8.2
  Top Layer w0.2: J1.1@43.201,28.52 D1.1
  Top Layer w0.3: U2.7 ccw(c43.722,36.532) 42.911,35.722 D1.1
CAN_L: D1.2 J1.2 R1.1 U2.6 | length 11.4
  Top Layer w0.2: D1.2 41.3,28.882 ccw(c43.84,28.882) 42.044,27.086 J1.2
  Top Layer w0.3: D1.2 41.59,35.722 ccw(c40.779,36.532) U2.6
CAN_RX: U1.45 U2.4 | length 9.6
  Top Layer w0.2: U1.45 36.785,37.011 ccw(c36.785,38.261) 37.669,37.377 38.657,38.365 ccw(c37.614,39.407) 39.089,39.407 39.089,40.425 cw(c39.637,40.425) 39.637,40.974 40.367,40.974 cw(c40.367,40.415) 40.925,40.415 ccw(c41.608,40.415) 41.125,39.932 cw(c40.763,39.57) 41.275,39.57 U2.4
CAN_TX: U1.46 U2.1 | length 12.5
  Top Layer w0.2: U1.46 36.733,37.511 ccw(c36.733,38.661) 37.547,37.848 38.287,38.589 ccw(c37.228,39.648) 38.726,39.648 38.726,40.448 cw(c39.666,40.448) 39.666,41.388 42.791,41.388 cw(c42.791,40.666) 43.513,40.666 43.513,40.264 cw(c43.044,40.264) 43.375,39.932 ccw(c43.738,39.57) 43.225,39.57 U2.1
DM: U1.32
DP: U1.33
GND: C1.1 C2.1 C3.1 C5.1 C6.1 C7.1 C8.1 C9.1 C10.1 C11.1 C12.1 C13.1 C14.2 C15.1 C16.1 C17.1 C18.1 C19.2 C20.1 C22.2 C23.2 C25.1 C27.2 C28.2 C29.2 C30.2 D1.3 D4.1 J2.3 Q1.3 Q4.3 R8.1 R17.2 R18.2 R19.2 R20.2 R21.2 R24.2 R25.2 TP24.1 TP25.1 U1.8 U1.23 U1.35 U1.44 U1.47 U2.2 U2.8 U2.9 U3.4 U4.4 U5.1 U6.1 U6.9 U6.12 U6.15 U6.16 U6.39 | length 71.1
  Top Layer w0.2: C12.1 27.051,39.186 cw(c27.051,38.429) 27.586,38.964 27.773,38.776 ccw(c28.415,39.418) 28.415,38.511 29.67,38.511 ccw(c29.67,39.115) 30.274,39.115 U1.8 ; v1(33.024,29.301) ccw(c33.122,29.399) 33.122,29.261 J2.3
  Top Layer w0.25: v1(25.62,31.638) C9.1 25.524,32.344 25.524,33.064 cw(c25.97,33.064) 25.97,33.511 U1.23 ; v1(33.024,29.301) 33.024,29.936 ccw(c32.42,30.54) 33.274,30.54 U1.35 ; v1(34.418,39.781) C10.1 34.343,38.844 ccw(c34.65,38.537) 34.216,38.537 34.216,38.011 ; U1.44 34.634,36.511 cw(c34.634,36.929) 34.216,36.929 34.216,38.011 ; U1.47 34.216,38.011 ; U2.9@41.85,37.532 ccw(c41.85,37.932) v1(42.25,37.932) ; C2.1 ccw(c43.173,39.91) 42.575,39.91 U2.2 42.575,38.257 cw(c42.25,38.257) v1(42.25,37.932) ; U2.8 43.225,37.264 ccw(c42.618,37.264) 42.618,37.871 42.311,37.871 cw(c42.311,37.932) v1(42.25,37.932)
  Top Layer w0.28: R17.2 1.189,31.819 4.454,31.819 ccw(c4.454,32.231) 4.866,32.231 4.866,33.064 cw(c5.434,33.064) 5.434,33.632 U6.9 U6.39@9.115,33.632 ; U6.16 9.115,30.132 9.115,30.632 ; U6.15 9.115,30.632 ; U6.12 U6.39@9.115,32.132 ; U6.1 9.115,37.632 U6.39@9.115,33.632 ; 9.115,30.632 U6.39@9.115,32.132 ; U6.39@9.115,32.132 U6.39@9.115,33.632
  Top Layer w0.3: U4.4 cw(c28.02,26.125) 28.97,26.125 28.97,24.837 cw(c27.433,24.837) C8.1@28.521,23.751 ; C3.1 40.122,40.325 40.529,39.919 cw(c40.071,39.461) 40.677,39.688 cw(c40.071,39.461) 40.718,39.461 40.718,39.124 ccw(c41.697,39.124) v1(41.005,38.432)
  Top Layer w0.35: v1(39.587,40.332) C3.1 ; C2.1 v1(42.75,40.867)
  Top Layer w0.4: v1(17.12,26.303) C19.2 ; R19.2 v1(18.438,38.582) ; R18.2 v1(18.438,39.934) 20.771,39.934 cw(c20.771,39.823) R8.1 21.013,39.902 cw(c21.013,37.374) C1.1 v1(23.441,39.161) C13.1 C12.1@26.574,39.161 ; C14.2 v1(19.179,38.582) ; v1(27.751,23.75) C8.1
  Top Layer w0.45: U5.1 C15.1@40.668,27.988
  Top Layer w0.5: C15.1 v1(40.519,28.936) ; D1.3 v1(42.25,34.38)
  other v1: 6.207,2.017 12.207,2.017 14.207,2.017 16.207,2.017 24.207,2.017 7.207,4.017 17.207,4.017 25.207,4.017 27.207,4.017 29.207,4.017 18.207,6.017 20.207,6.017 22.207,6.017 24.207,6.017 19.207,8.017 21.207,8.017 23.207,8.017 25.207,8.017 27.207,8.017 29.207,8.017 26.207,10.017 28.207,10.017 32.207,10.017 21.207,12.017 23.207,12.017 25.207,12.017 27.207,12.017 33.207,12.017 21.207,16.017 23.207,16.017 2.207,18.017 6.207,18.017 20.207,18.017 22.207,18.017 37.683,18.712 38.303,18.712 39.009,19.419 39.009,20.038 37.683,20.744 38.303,20.744 35.434,21.512 36.053,21.512 6.207,22.017 34.455,22.428 7.207,24.017 38.434,25.448 40.824,25.448 2.207,26.017 4.207,26.017 6.207,26.017 18.207,26.017 22.207,26.017 24.207,26.017 26.207,26.017 23.207,28.017 25.207,28.017 33.207,28.017 35.207,28.017 22.207,30.017 40.207,30.017 42.25,30.783 30.207,34.017 32.207,34.017 9.207,36.017 11.207,36.017 29.207,36.017 31.207,36.017 33.207,36.017 41.005,37.433 6.207,38.017 28.207,38.017 30.207,38.017 32.207,38.017 3.775,38.66 10.277,39.791 9.207,40.017 11.207,40.017 19.207,40.017 22.894,41.25 32.785,41.434
  other v2: 8.2,3.889 9,3.889 9.8,3.889 11.45,3.889 12.25,3.889 13.05,3.889 14.7,3.889 15.5,3.889 16.3,3.889 8.2,4.689 9,4.689 9.8,4.689 11.45,4.689 12.25,4.689 13.05,4.689 14.7,4.689 15.5,4.689 16.3,4.689 8.2,5.489 9,5.489 9.8,5.489 11.45,5.489 12.25,5.489 13.05,5.489 14.7,5.489 15.5,5.489 16.3,5.489 29.45,9.896 30.25,9.896 31.05,9.896 34.7,9.896 35.5,9.896 36.3,9.896 29.45,10.696 30.25,10.696 31.05,10.696 34.7,10.696 35.5,10.696 36.3,10.696 29.45,11.496 30.25,11.496 31.05,11.496 34.7,11.496 35.5,11.496 36.3,11.496 25.52,14.095 26.32,14.095 27.12,14.095 25.52,14.895 26.32,14.895 27.12,14.895 25.52,15.695 26.32,15.695 27.12,15.695
  other v3: 9.825,32.132 10.825,32.132 9.825,33.132 10.825,33.132 9.825,34.132 10.825,34.132
LOAD: pad.2 U1.29 U4.3 | length 4.7
  Top Layer w0.25: U1.29 30.274,27.119 30.318,27.075 U4.3
NetC4_1: C4.1 U3.6 | length 1.2
  Top Layer w0.3: U3.6 C4.1
NetC4_2: C4.2 L1.1 U3.5 | length 4.4
  Top Layer w0.5: C4.2 32.743,24.628 32.743,24.539 ; U3.5 32.743,24.539 ; L1.1 ccw(c34.355,24.539) 32.743,24.539
NetC12_2: C12.2 L2.2 U1.9 | length 5.6
  Top Layer w0.2: C12.2 cw(c26.574,39.326) 26.783,40.16 cw(c26.574,39.326) 27.182,39.934 28.086,39.03 ccw(c28.494,39.438) 28.494,38.861 29.474,38.861 ccw(c29.474,39.161) 29.774,39.161 U1.9
  Top Layer w0.4: L2.2 C12.2@26.574,40.161
NetC14_1: C14.1 R9.2 U6.30 | length 8.4
  Top Layer w0.25: U6.30 13.829,33.632 ccw(c13.829,34.486) 14.432,33.882 cw(c15.036,33.279) 15.036,34.132 19.293,34.132 19.4,34.026 R9.2
  Top Layer w0.4: C14.1 19.4,35.552 R9.2@19.4,34.026
NetC19_1: C19.1 D5.1 Q2.2 U6.26 | length 5.5
  Top Layer w0.28: U6.26 15.801,31.632 cw(c15.801,30.677) Q2.2@16.476,31.353
  Top Layer w0.4: Q2.2@16.503,31.138 cw(c15.012,29.647) 17.12,29.647 C19.1
NetC21_1: C21.1 L3.1 Q3.3 Q4.2 U6.21 | length 23.2
  Top Layer w0.28: Q3.3 10.75,15.85 ccw(c9.302,15.85) 9.302,17.298 cw(c9.241,18.096) 8.697,17.508 cw(c9.58,18.462) 8.28,18.462 8.28,23.162 cw(c8.918,23.162) 8.918,23.8 12.76,23.8 ccw(c12.76,26.34) 13.752,24.002 ccw(c12.76,26.34) 15.3,26.34 C21.1@15.3,27 ; U6.21 14.075,29.132 cw(c14.075,28.767) 14.44,28.767 14.44,27.379 ccw(c14.87,27.379) 14.87,26.949 C21.1
NetC21_2: C21.2 D5.2 U6.22 | length 3
  Top Layer w0.25: U6.22 15,29.632 cw(c14.397,29.029) 15.25,29.029 C21.2
NetC24_2: C24.2 L3.2 R16.1 U6.3 | length 38.1
  Top Layer w0.25: C24.2 6.211,36.937 ccw(c6.947,37.674) 6.947,36.632 U6.3
  Top Layer w0.4: v1(5.488,37.242) C24.2 ; R16.1 v1(26.267,21.25)
  Bottom Layer w0.25: v1(5.488,37.242) 5.007,37.242 ccw(c5.007,36.761) 4.525,36.761 4.525,34.899 ccw(c6.169,34.899) 5.007,33.736 8.883,29.86 ccw(c10.736,31.713) 10.736,29.092 18.459,29.092 cw(c18.459,28.372) 19.179,28.372 19.179,24.355 ccw(c21,24.355) 21,22.534 25.871,22.534 cw(c25.871,22) 26.405,22 26.405,21.582 cw(c25.936,21.582) v1(26.267,21.25)
NetC26_2: C26.2 R22.2 R25.1 U6.6 | length 6.1
  Top Layer w0.25: R25.1 4.33,35.687 ccw(c5.67,37.027) 5.67,35.132 U6.6
  Top Layer w0.4: R22.2 R25.1
NetC27_1: C27.1 R23.1 U6.7 | length 5
  Top Layer w0.25: C27.1 R23.1 ccw(c4.454,35.875) 4.454,34.632 U6.7
NetC28_1: C28.1 R23.2 | length 1
  Top Layer w0.25: C28.1 R23.2
NetC29_1: C29.1 U6.5 | length 3
  Top Layer w0.25: C29.1 ccw(c5.428,36.242) 5.428,35.632 U6.5
NetD2_2: D2.2 R5.1 | length 1.5
  Top Layer w0.25: R5.1 D2.2
NetD3_1: D3.1 Q1.2 TP22.1
NetF1_1: F1.1 TP21.1 | length 1.8
  Top Layer w1: F1.1 37.271,32 TP21.1
NetJ3_2: J3.2 R10.2 U6.34 | length 3.9
  Top Layer w0.28: U6.34 R10.2@15.785,35.632
  Top Layer w0.4: R10.2@15.785,35.443 15.785,35.632 15.785,36.632 J3.2
NetQ1_1: Q1.1 R7.2 | length 7.5
  Top Layer w0.28: Q1.1 cw(c28.961,5.225) 28.961,7.221 29.046,7.221 ccw(c29.046,8.974) 30.286,7.734 30.613,8.062 cw(c31.792,6.883) 31.792,8.55 R7.2
NetQ2_1: Q2.1 U6.28 | length 3.5
  Top Layer w0.28: U6.28 14.983,32.632 ccw(c14.983,34.741) 16.474,33.25 Q2.1@16.476,33.253
NetQ3_1: Q3.1 U6.20 | length 25.1
  Top Layer w0.28: Q3.1@11,10.214 Q3.1 9.46,10.214 cw(c9.46,11.174) 8.5,11.174 8.5,16.434 ccw(c7.134,16.434) 8.1,17.4 cw(c8.872,18.172) 7.78,18.172 7.78,23.129 cw(c8.909,23.129) 8.909,24.257 11.377,24.257 ccw(c11.377,25.38) 12.5,25.38 12.5,28.632 U6.20
NetQ4_1: Q4.1 U6.24 | length 26.8
  Top Layer w0.28: U6.24 14.758,30.632 cw(c14.758,29.365) 16.025,29.365 16.025,27.12 ccw(c17.817,27.12) 16.55,25.852 16.566,25.836 cw(c14.317,23.586) 17.498,23.586 17.498,19.201 ccw(c18.481,19.201) 17.786,18.506 20.117,16.175 cw(c19.192,15.25) 20.5,15.25 20.5,11.25 ccw(c21.536,11.25) 21.536,10.214 Q4.1
NetR5_2: R5.2 U1.2 | length 2.7
  Top Layer w0.25: U1.2 33.274,40.811 cw(c33.695,40.811) 33.695,41.231 33.943,41.231 cw(c33.943,39.93) R5.2
NetR7_1: R7.1 U4.5 | length 25.6
  Top Layer w0.3: R7.1 36.515,8.55 ccw(c36.515,9.718) 37.683,9.718 v1(37.683,12.714)
  Top Layer w0.4: U4.5 v1(28.02,25.944)
  Bottom Layer w0.3: v1(28.02,25.944) 31.006,22.958 cw(c29.21,21.162) 31.75,21.162 31.75,20.744 ccw(c32.994,20.744) 32.994,19.5 35.457,19.5 cw(c35.457,18.068) 36.469,19.081 37.247,18.303 cw(c36.195,17.25) 37.683,17.25 v1(37.683,12.714)
NetR11_2: R11.2 R18.1 U6.37 | length 5.3
  Top Layer w0.28: U6.37 14.025,37.132 ccw(c14.025,37.632) 14.525,37.632 14.525,39.676 R11.2
  Top Layer w0.4: R11.2 R18.1
NetR12_2: R12.2 R19.1 U6.36 | length 8.9
  Top Layer w0.2: R12.2 16.044,41.184 cw(c16.044,40.359) 16.869,40.359 16.869,39.509 cw(c16.562,39.509) 16.779,39.293 R19.1
  Top Layer w0.28: U6.36 14.024,36.632 ccw(c14.024,37.599) 14.99,37.599 14.99,38.272 cw(c15.3,38.272) 15.3,38.582 R19.1
NetR13_2: R13.2 R20.1 U6.18 | length 5.9
  Top Layer w0.25: R20.1 ccw(c5.465,30.654) 5.465,29.132 U6.18 8.372,29.132 cw(c8.372,28.78) 8.725,28.78 R13.2
NetR14_2: R14.2 R21.1 U6.19 | length 4.3
  Top Layer w0.25: R21.1 cw(c5.36,27.26) 5.36,28.632 U6.19@7.264,28.632 ; R14.2 U6.19@7.264,28.632 ; U6.19 U6.19@7.264,28.632
NetR15_2: R15.2 R17.1 U6.8 | length 5.7
  Top Layer w0.25: R17.1 R15.2 4.063,33.045 cw(c5.151,33.045) 5.151,34.132 U6.8
NetR24_1: R24.1 U6.17 | length 3.5
  Top Layer w0.25: R24.1 5.065,30.25 ccw(c6.556,31.741) 6.556,29.632 U6.17
RX: TP12.1 U1.43 | length 4.8
  Top Layer w0.2: U1.43 36.203,36.011 ccw(c36.203,38.551) 37.999,36.755 TP12.1
SCL: R2.1 TP15.1 U1.21 | length 9.6
  Top Layer w0.25: TP15.1 23.781,31.673 ccw(c22.08,33.374) 24.486,33.374 cw(c25.623,33.374) 25.623,34.511 U1.21 27.489,34.511 cw(c27.489,34.136) 27.864,34.136 27.864,33.069 cw(c27.216,33.069) 27.674,32.61 27.597,32.533 ccw(c27.905,32.225) 27.469,32.225 R2.1
SDA: R3.1 TP16.1 U1.22 | length 5.3
  Top Layer w0.25: TP16.1 ccw(c23.451,31.988) 24.969,31.988 24.969,33.298 cw(c25.682,33.298) 25.682,34.011 U1.22 ; TP16.1@24.969,30.915 R3.1
SWCLK: J2.1 U1.37 | length 1.1
  Top Layer w0.2: J2.1@35.349,31.912 U1.37
SWDIO: J2.2 U1.34 | length 5.5
  Top Layer w0.2: U1.34 32.774,32.189 cw(c33.208,32.189) 33.208,32.624 34.062,32.624 cw(c34.062,32.223) 34.463,32.223 34.463,30.871 ccw(c34.823,30.871) 34.823,30.511 J2.2
T1_2: TP13.1 U1.30 | length 3.8
  Top Layer w0.25: U1.30 30.774,30.363 ccw(c33.314,30.363) 31.518,28.567 TP13.1
T1_3: TP14.1 U1.31 | length 2.1
  Top Layer w0.25: U1.31 31.274,30.876 ccw(c32.638,30.876) 31.673,29.912 TP14.1
T2_1: TP19.1 U1.38 | length 4.1
  Top Layer w0.2: U1.38 38.966,33.511 cw(c38.966,32.931) TP19.1
T2_2: TP5.1 U1.39 | length 4.1
  Top Layer w0.2: U1.39 38.68,34.011 ccw(c38.68,34.995) TP5.1
T3_1: TP6.1 U1.40 | length 4.2
  Top Layer w0.2: U1.40 37.577,34.511 ccw(c37.577,37.051) 39.373,35.255 TP6.1
T3_2: TP8.1 U1.41 | length 4.4
  Top Layer w0.2: U1.41 37.119,35.011 ccw(c37.119,37.551) 38.915,35.755 TP8.1
T3_3: TP3.1 U1.18 | length 5
  Top Layer w0.2: TP3.1 23.024,33.182 25.609,35.767 ; 25.61,35.767 cw(c26.198,35.178) 26.198,36.011 U1.18
TX: TP10.1 U1.42 | length 4.6
  Top Layer w0.2: U1.42 36.661,35.511 ccw(c36.661,38.051) 38.457,36.255 TP10.1
Vb: C16.2 C17.2 C18.2 D4.2 J3.1 Q2.3 Q3.2 R6.2 R9.1 R10.1 TP23.1 | length 52.3
  Top Layer w0.4: R10.1@17.215,35.443 J3.1@17.215,36.632 ; v2(18.476,28.18) Q2.3@18.476,32.303
  Top Layer w0.5: Q2.3 18.476,32.303 R9.1 ; v1(19.523,31.355) R9.1 ; R6.2 R9.1
  Top Layer w1.5: C18.2 C16.2 C17.2
  Bottom Layer w0.4: TP23.1 1.597,8.153 1.597,12.1 3.392,13.895 ccw(c1.596,15.691) 4.136,15.691 4.136,16.5 cw(c6.396,16.5) 4.798,18.098 14.136,27.436 cw(c15.932,25.64) 15.932,28.18 v2(18.476,28.18)
  Bottom Layer w0.5: J3.1 18.779,34.979 cw(c16.983,33.183) 19.523,33.183 v1(19.523,31.355)
  other v2: 8.2,6.7 9,6.7 9.8,6.7 11.45,6.7 12.25,6.7 13.05,6.7 14.7,6.7 15.5,6.7 16.3,6.7 8.2,7.5 9,7.5 9.8,7.5 11.45,7.5 12.25,7.5 13.05,7.5 14.7,7.5 15.5,7.5 16.3,7.5 8.2,8.3 9,8.3 9.8,8.3 11.45,8.3 12.25,8.3
Vint: C20.2 R11.1 R12.1 R13.1 R14.1 R15.1 U6.10 U6.38 | length 39.6
  Top Layer w0.25: R15.1 cw(c6.846,31.459) 6.846,33.132 U6.10
  Top Layer w0.28: U6.38 C20.2
  Top Layer w0.4: v1(5.663,26.768) R14.1 5.858,27.518 6.556,26.82 ; v1(5.663,31.892) R15.1 ; 6.556,26.819 ccw(c7.19,27.455) 7.19,26.557 9.075,26.557 ccw(c9.075,27.254) 9.568,26.761 R13.1 ; R12.1@13.182,41.184 R11.1 C20.2 v1(14,38.732)
  Bottom Layer w0.4: v1(5.663,26.768) v1(5.663,31.892) 3.359,34.196 cw(c4.258,35.095) 2.987,35.095 2.987,36.345 2.987,39.312 cw(c4.631,39.312) 4.631,40.956 11.047,40.956 cw(c11.047,39.196) 12.292,40.44 v1(14,38.732)
pads on no net: U1.3 U1.4 U1.5 U1.6 U1.7 U1.10 U1.11 U1.19 U1.25 U4.1 U6.2 U6.11 U6.13 U6.14

## Polygon pours and split planes (outlines as drawn)
GND on Top Layer "NONET_L02_P-001" (solid, remove dead copper, pour order 57): 0,42 0,0 45,0 45,42
GND on Top Layer "NONET_L02_P-001" (solid, remove dead copper, pour order 36): 0.559,27.335 ccw(c2.042,27.335) 2.042,25.852 9.294,25.852 ccw(c9.294,28.392) 11.834,28.392 11.834,39.765 ccw(c10.825,39.765) 10.825,40.774 1.206,40.774 ccw(c1.206,40.127) 0.559,40.127
Vb on Top Layer "NONET_L02_P-001" (solid, remove dead copper, pour order 52): -1.2,4.6 5.393,4.6 ccw(c5.393,6.307) 6.6,5.1 6.756,5.256 cw(c8.552,3.46) 8.552,6 16.9,6 ccw(c16.9,6.6) 17.5,6.6 17.5,8.5 ccw(c17,8.5) 17,9 9.692,9 cw(c9.692,10.392) 8.3,10.392 8.3,16.5 -1.2,16.5
NetC21_1 on Top Layer "NONET_L02_P-001" (solid, remove dead copper, pour order 55): 9,23.2 9,12 ccw(c9.6,12) 9.6,11.4 11.8,11.4 cw(c11.8,10.7) 12.5,10.7 12.5,9.6 ccw(c13.1,9.6) 13.1,9 19.7,9 ccw(c19.7,9.3) 20,9.3 20,16.2 18.244,17.956 cw(c20.04,19.752) 17.5,19.752 17.5,22.9 12.4,22.9
12V on Top Layer "NONET_L02_P-001" (solid, remove dead copper, pour order 54): 27.6,23.1 ccw(c27.6,22.8) 27.3,22.8 27.3,19.8 cw(c26.5,19.8) 26.5,19 25.5,19 ccw(c25.5,17.9) 24.4,17.9 24.4,16.9 ccw(c24.9,16.9) 24.9,16.4 27.3,16.4 cw(c27.3,15.6) 28.1,15.6 28.1,14.5 ccw(c29.1,14.5) 29.1,13.5 35.448,13.5 cw(c35.448,10.96) 37.244,12.756 38.456,11.544 ccw(c40.252,13.34) 40.252,10.8 45.5,10.8 45.5,18.4 37,18.4 cw(c37,18.6) 36.8,18.6 36.8,20.3 ccw(c36.4,20.3) 36.4,20.7 33,20.7 ccw(c33,20.1) 32.4,20.1 32.4,19.5 cw(c31.8,19.5) 31.8,18.9 31.7,18.9 cw(c31.7,19.6) 31,19.6 31,22.8 ccw(c30.7,22.8) 30.7,23.1
NetD3_1 on Top Layer "NONET_L02_P-001" (solid, remove dead copper, pour order 53): 45.9,8.3 31.5,8.3 ccw(c31.5,7.1) 30.3,7.1 30.3,-0.9 45.9,-0.9
GND on Bottom Layer "NONET_L02_P-001" (solid, remove dead copper, pour order 58): 0,42 0,0 45,0 45,42
GND on Bottom Layer "NONET_L02_P-001" (solid, remove dead copper, pour order 50): 0.559,28.585 ccw(c2.042,28.585) 2.042,27.102 9.294,27.102 ccw(c9.294,29.642) 11.834,29.642 11.834,41.015 ccw(c10.825,41.015) 10.825,42.024 1.206,42.024 ccw(c1.206,41.377) 0.559,41.377
Vb on Bottom Layer "NONET_L02_P-001" (solid, remove dead copper, pour order 56): 17.5,15.42 ccw(c16.42,15.42) 16.42,16.5 -1.2,16.5 -1.2,4.6 5.393,4.6 ccw(c5.393,6.307) 6.6,5.1 6.756,5.256 cw(c8.552,3.46) 8.552,6 16.9,6 ccw(c16.9,6.6) 17.5,6.6

## Keep-outs
Keep-Out Layer:
  lines w0: 0,0.5 ccw(c0.5,0.5) 0.5,0 ; 0,41.5 cw(c0.5,41.5) 0.5,42 ; 44.5,42 cw(c44.5,41.5) 45,41.5 ; 44.5,-0.001 ccw(c44.5,0.499) 45,0.499
  lines w0.001: 0,0.5 0,41.5 ; 0.5,0 44.5,0 ; 0.5,42 44.5,42 ; 45,0.5 45,41.5

## Other copper
Top Layer:
  region net NetC24_2: 25.782,19.493 25.782,23.007 19,23.007 19,19.493
  pour cut-out: 12.063,37.632 12.063,24.364 14,24.364 14,37.632
Bottom Layer:
  region net 12V: 34.215,18.1 ccw(c34.215,17.759) 33.874,17.759 33.874,16.135 ccw(c34.232,16.135) 34.232,15.777 35.842,15.777 ccw(c35.842,16.12) 36.185,16.12 36.185,17.764 ccw(c35.849,17.764) 35.849,18.1
Multi-Layer:
  pour cut-out: 27.195,20.863 ccw(c27.195,21.2) 27.532,21.2 27.532,21.224 ccw(c27.142,21.224) 27.142,21.613 26.195,21.613 ccw(c26.195,21.2) 25.782,21.2 ccw(c26.119,21.2) 26.119,20.863
  pour cut-out: 5.825,37.295 ccw(c5.488,37.295) 5.488,37.632 5.465,37.632 ccw(c5.465,37.242) 5.075,37.242 5.075,36.295 ccw(c5.488,36.295) 5.488,35.882 ccw(c5.488,36.219) 5.825,36.219

## Silkscreen, mask and mechanical layers (free items; w line width, h text height)
Bottom Overlay:
  text "EBC Aux Power / 2k23 v1.0.0" at 25.61,4.689 h0.8